# Altium PCB ZD-STM32-ZOUYU(remove layoout).PcbDoc (part 5 of 8)
Units mm, origin at the board's own origin, x right, y up, seen from the top; angles counter-clockwise.
Board outline 251.84 x 139.06 mm, 2 copper layers (Top Layer, Bottom Layer); 253 components, 246 nets, 1172 pads, 599 vias.
Unrouted connection lines stored in the file: 47.
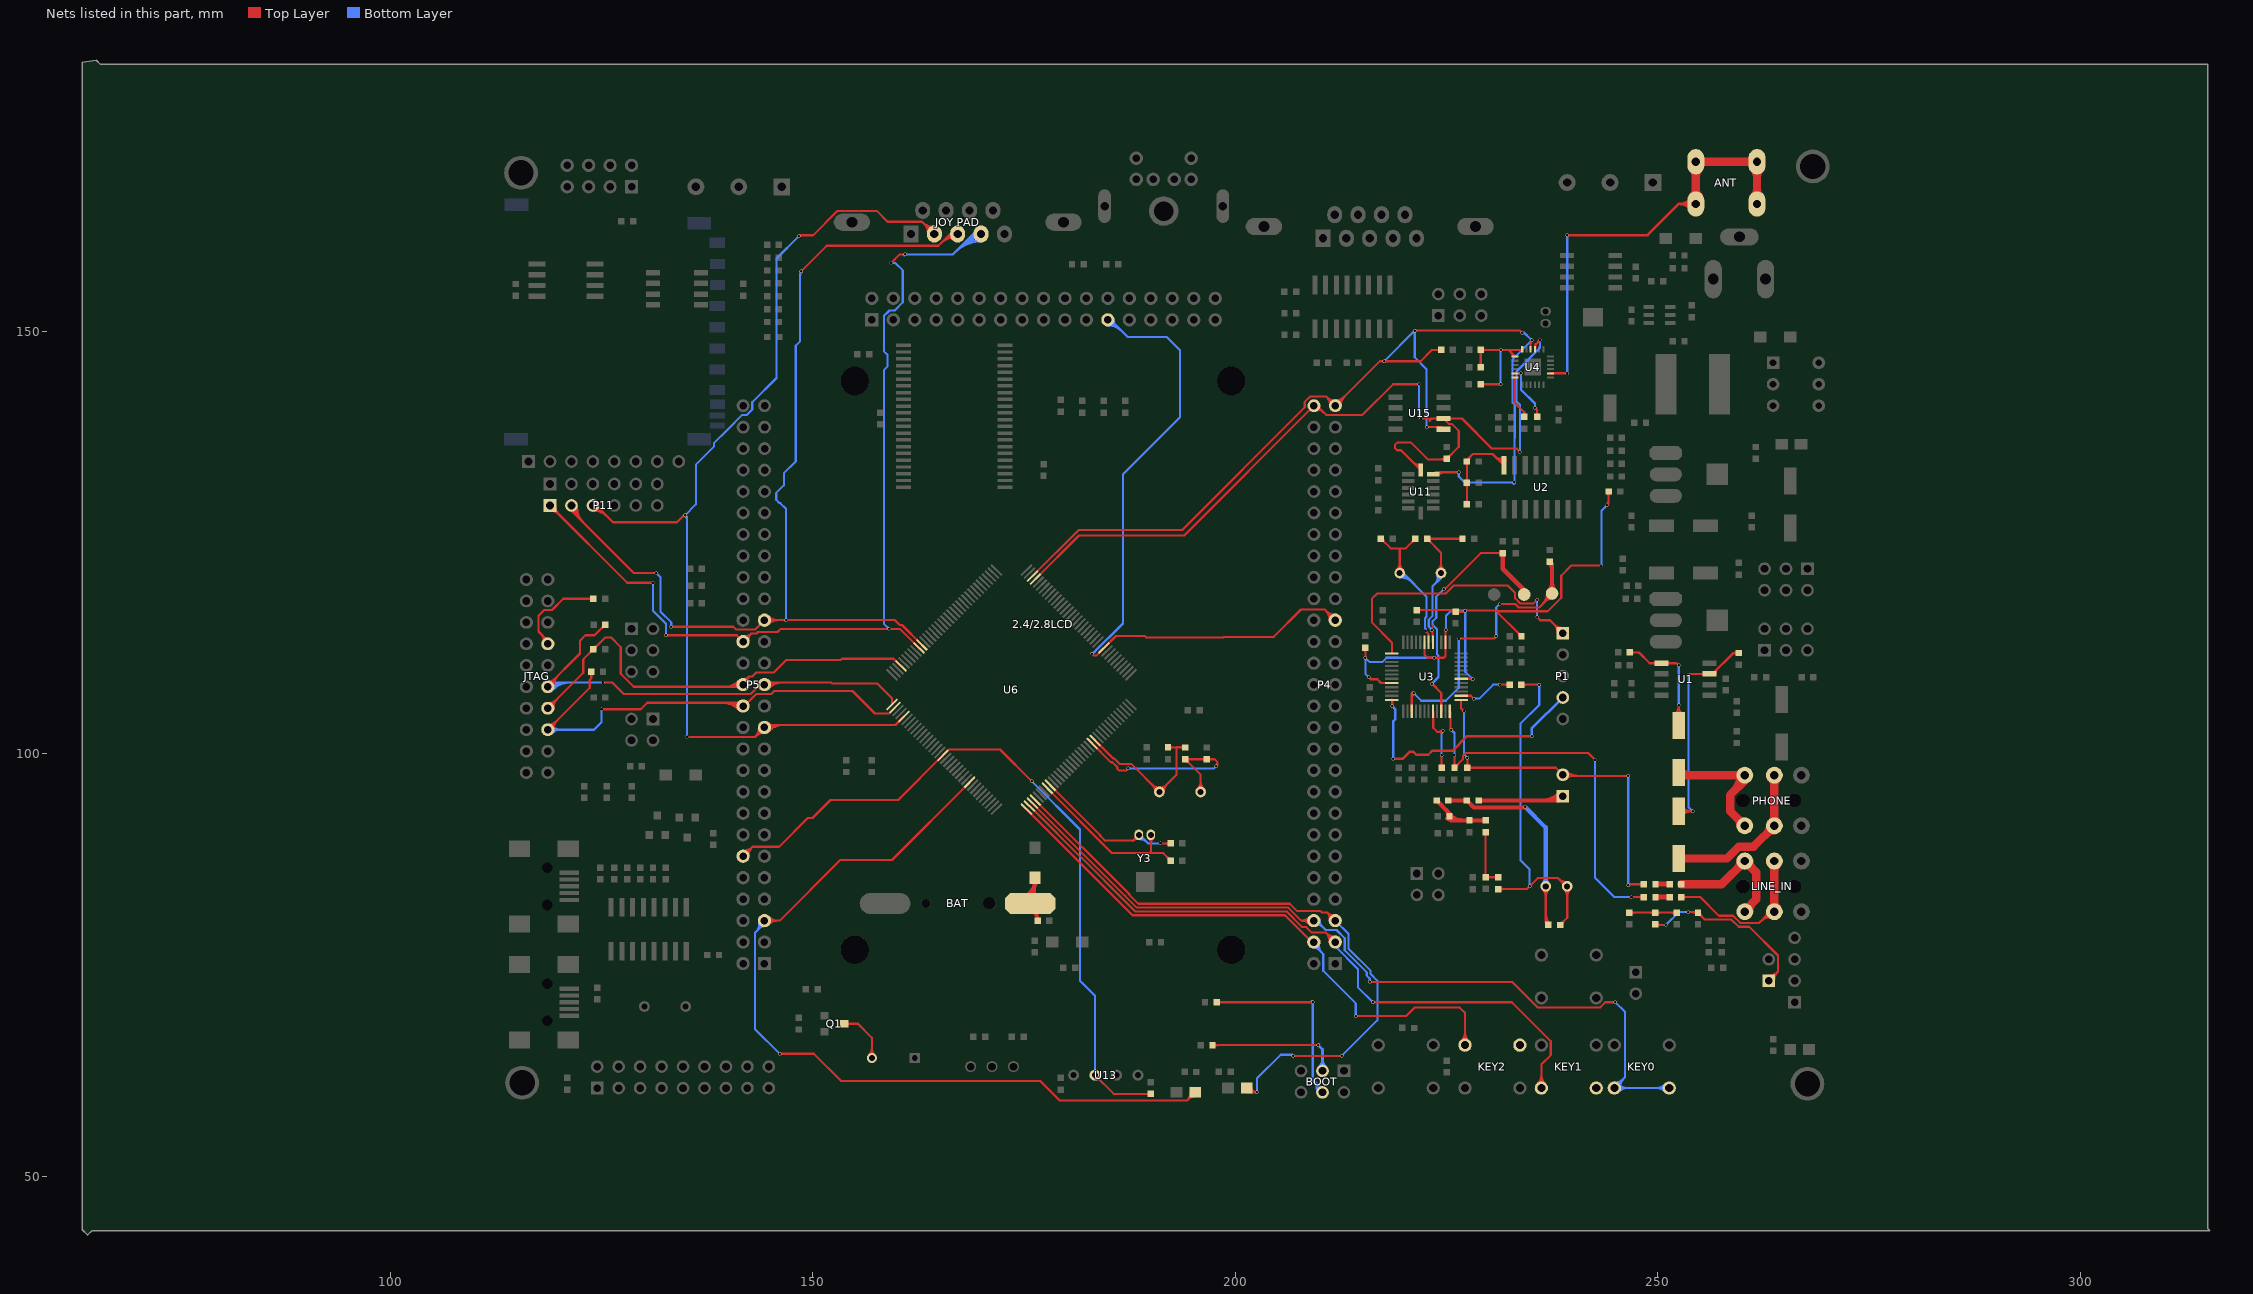
[diagram p5: the nets of this part, all layers, seen from the top]

## Via types
v1: diameter 0.4, hole 0.3, Top Layer to Bottom Layer, 598 vias
v2: diameter 0.3, hole 0.2, Top Layer to Bottom Layer, 1 vias

## Nets (pads, with @x,y where several pads share a name; then routed paths per layer and width w, separated by ;. In a path a pad name is that pad's centre, name@x,y a point inside that pad or via, vN(x,y) a via of type N, cw(c..) or ccw(c..) an arc to the next point about the centre after c; other vN are vias at no path point) (continued)
"IIC SCL": P4.54 R61.1 U4.9 U6.69 U11.14 U15.6 | length 115.8
  Top Layer w0.254: U6.69@176.327,120.689 181.495,125.857 193.929,125.857 P4.54@209.296,141.224 209.658,141.224 210.747,140.135 215.046,140.135 218.675,143.764 v1(221.742,143.764) ; P4.54@209.3,141.097 cw(c209.337,140.018) 210.101,140.781 ; P4.54@209.309,140.843 cw(c209.364,139.217) 210.514,140.368 ; P4.54@209.931,141.224 ccw(c210.59,141.224) 210.124,140.758 ; 220.882,134.668 ccw(c221.945,135.731) U11.14@221.945,134.227 ; 221.315,134.234 ccw(c221.945,134.864) U11.14@221.945,133.973 ; U11.14@221.749,133.8 ccw(c221.945,133.997) U11.14@221.945,133.719 ; v1@221.869,139.827 v1(221.996,139.7) 223.266,139.7 ; U11.14@221.945,133.604 219.605,135.944 219.141,135.944 218.875,136.21 218.875,136.586 219.141,136.852 220.802,136.852 222.78,134.874 224.968,134.874 R61.1@225.044,134.95 226.441,136.347 226.441,138.242 225.609,139.074 225.273,139.074 U15.6@224.648,139.7 ; 223.012,139.446 223.266,139.7 ; U15.6@224.005,139.565 ccw(c223.68,139.24) 223.68,139.7 ccw(c223.68,140.16) U15.6@224.005,139.835 ; 224.247,134.874 ccw(c224.247,135.747) R61.1@224.864,135.13 ; 224.615,134.874 cw(c224.615,134.521) R61.1@224.864,134.771 ; R61.1@225.044,135.204 ccw(c225.044,135.817) 225.478,135.384 ccw(c225.911,134.95) R61.1@225.298,134.95 ; U15.6@225.291,139.565 cw(c225.616,139.24) 225.616,139.7 cw(c225.616,140.16) U15.6@225.291,139.835 ; v1(233.68,135.763) 233.299,136.144 230.378,136.144 226.822,139.7 U15.6@224.648,139.7 ; U4.9@235.454,147.897 235.502,147.945 235.502,148.507 235.576,148.507 v1(236.067,148.997) ; 223.266,139.7 U15.6@224.648,139.7
  Bottom Layer w0.254: v1(221.742,143.764) 221.742,139.954 v1(221.996,139.7) ; 233.553,141.468 233.268,141.753 233.268,145.264 236.067,148.063 v1(236.067,148.997) ; v1(233.68,135.763) 233.68,141.341
"IIC SDA": P4.53 R62.1 U4.10 U6.70 U11.13 U15.5 | length 134.8
  Top Layer w0.254: U6.70@175.973,121.042 181.423,126.492 193.675,126.492 208.207,141.024 208.207,141.675 208.845,142.313 210.747,142.313 P4.53@211.836,141.224 217.099,146.487 v1(217.607,146.487) 221.925,146.487 223.266,147.828 R62.1@224.358,147.828 ; P4.53@211.201,141.224 ccw(c209.668,141.224) 210.752,142.308 ccw(c211.836,143.392) 211.836,141.859 ccw(c211.836,143.392) 212.92,142.308 ccw(c214.004,141.224) P4.53@212.471,141.224 ; P4.53@211.455,141.224 ccw(c210.535,141.224) 211.186,141.874 ccw(c211.836,142.525) 211.836,141.605 ccw(c211.836,142.525) 212.486,141.874 ccw(c213.137,141.224) P4.53@212.217,141.224 ; v1(221.234,150.114) 233.68,150.114 v1(233.934,149.86) ; v1(222.631,138.684) 224.394,138.684 U15.5@224.648,138.43 ; U11.13@223.426,133.096 223.68,133.35 v1(226.441,133.35) ; U11.13@223.833,133.189 cw(c224.223,132.799) 224.223,133.35 ; U11.13@224.013,133.009 cw(c224.836,132.186) 224.836,133.35 ; U4.10@234.954,147.897 234.954,148.848 v1(235.077,148.971) ; 234.954,148.498 cw(c235.55,148.498) v1@235.129,148.919
  Bottom Layer w0.254: P4.53@211.836,141.224 P4.53@212.344,141.224 ; v1(217.607,146.487) v1(221.234,150.114) 221.234,146.939 222.631,145.542 v1(222.631,138.684) ; v1(226.441,133.35) 226.441,132.842 227.146,132.137 v1(233.026,132.137) ; 232.918,131.953 233.064,132.099 v1(233.026,132.137) ; v1@233.934,149.787 cw(c233.934,148.998) 234.492,149.556 ; v1(233.934,149.86) 234.188,149.86 v1(235.077,148.971) 232.814,146.708 232.814,141.565 233.064,141.315 233.064,137.416 233.026,137.378 v1(233.026,132.137)
IOVDD: C11.2 C12.2 C13.2 R16.1 R17.2 U3.6 U3.14 U3.19 U3.32 | length 83.9
  Top Layer w0.254: R17.2@215.211,112.406 cw(c214.777,111.972) 215.39,111.972 cw(c216.004,111.972) R17.2@215.57,112.406 ; R17.2@215.39,112.585 215.39,111.381 v1(215.392,111.379) ; v1(215.773,109.093) 216.027,108.839 216.792,108.839 217.235,108.396 U3.32@218.527,108.396 ; C11.2@221.49,117.03 225.869,117.03 C12.2@226.06,116.84 ; C11.2@221.669,116.851 cw(c222.103,116.417) 222.103,117.03 cw(c222.103,117.644) C11.2@221.669,117.21 ; U3.19@222.377,113.246 222.377,111.76 222.758,111.379 v1(223.52,111.379) 224.663,111.379 224.877,111.593 U3.14@224.877,113.246 224.877,114.641 v1(224.917,114.681) ; 224.877,114.408 cw(c225.19,114.408) v1@224.969,114.629 ; 224.987,117.03 cw(c224.987,115.767) C12.2@225.88,116.66 ; 225.6,117.03 cw(c225.6,116.38) C12.2@226.06,116.84 ; C12.2@226.24,116.66 cw(c226.673,116.227) 226.673,116.84 cw(c226.673,117.453) C12.2@226.24,117.02 ; 226.72,116.84 ccw(c226.72,117.45) v1@227.151,117.019 ; U3.6@226.727,108.896 228.035,108.896 v1(228.092,108.839) ; 227.778,108.896 cw(c227.778,108.525) v1@228.04,108.787 ; C13.2@233.617,113.917 ccw(c233.003,113.917) 233.437,114.351 ccw(c233.87,114.785) C13.2@233.87,114.171 ; C13.2@233.87,113.917 230.821,116.967 ; v1(243.332,122.301) 239.776,122.301 238.567,121.092 238.567,118.491 236.963,116.887 230.901,116.887 230.821,116.967 ; v1@243.915,129.465 ccw(c243.3,130.08) 244.17,130.08 ; v1(243.967,129.413) 244.17,129.616 R16.1@244.17,131.064 ; R16.1@243.991,130.884 cw(c243.557,130.451) 244.17,130.451 cw(c244.783,130.451) R16.1@244.35,130.884 ; C12.2@226.06,116.84 227.076,116.84 v1(227.203,116.967) 230.821,116.967
  Bottom Layer w0.254: v1(215.773,109.093) 215.392,109.474 v1(215.392,111.379) 215.902,110.869 217.388,110.869 217.898,111.379 v1(223.52,111.379) ; v1(224.917,114.681) 224.917,116.332 225.552,116.967 v1(227.203,116.967) 227.203,109.728 v1(228.092,108.839) ; v1(243.332,122.301) 243.332,128.778 v1(243.967,129.413)
"IWIRE DQ": P5.12 R57.1 U6.126 U13.2 | length 90.4
  Top Layer w0.254: P5.12@141.721,87.895 142.836,89.009 ; P5.12@141.725,88.301 ccw(c141.732,89.255) 142.407,88.581 ccw(c143.081,87.906) P5.12@142.128,87.898 ; P5.12@141.727,88.555 ccw(c141.739,90.105) 142.836,89.009 ; P5.12@142.382,87.9 cw(c143.932,87.913) 142.836,89.009 ; v1(175.895,96.774) 172.14,100.529 166.066,100.529 U6.126@165.366,99.829 160.086,94.549 152.08,94.549 149.952,92.421 149.401,92.421 145.989,89.009 142.836,89.009 ; U13.2@183.388,61.976 185.598,59.766 R57.1@189.992,59.766
  Bottom Layer w0.254: v1(175.895,96.774) 181.61,91.059 181.61,73.152 183.388,71.374 U13.2@183.388,61.976
"JOY CLK": "JOY PAD.2" P5.23 P11.3 U6.113 | length 142.2
  Top Layer w0.254: P11.3@123.952,128.79 cw(c123.952,126.354) 125.674,128.077 ; P11.3@123.952,129.044 cw(c123.952,127.221) 125.241,128.51 ; P11.3@123.952,129.298 cw(c123.952,128.088) 124.807,128.944 ; P11.3@123.952,129.413 124.338,129.413 126.323,127.428 133.9,127.428 134.808,128.336 v1(134.874,128.27) ; P11.3@124.575,129.413 ccw(c125.147,129.413) 124.743,129.008 ; 134.524,128.052 cw(c134.874,127.702) v1@134.874,128.197 ; v1@135.001,102.108 v1(135.089,102.02) 143.147,102.02 ; P5.23@143.601,103.129 cw(c142.051,103.117) 143.147,102.02 ; P5.23@143.855,103.131 cw(c142.901,103.124) 143.575,102.449 cw(c144.25,101.775) P5.23@144.258,102.728 ; P5.23@144.256,102.474 ccw(c144.243,100.924) 143.147,102.02 ; P5.23@144.369,103.027 cw(c145.328,102.068) 145.328,103.424 ; P5.23@144.549,102.847 cw(c145.941,101.455) 145.941,103.424 ; P5.23@144.728,102.668 cw(c146.555,100.841) 146.555,103.424 ; P5.23@144.728,103.602 ccw(c145.156,104.03) 145.156,103.424 ; v1@148.388,161.238 cw(c148.773,160.853) 148.773,161.398 ; v1@148.499,161.398 150.025,161.398 152.911,164.284 157.537,164.284 158.826,162.995 162.912,162.995 164.363,161.544 ; U6.113@160.77,104.425 159.769,103.424 144.551,103.424 P5.23@144.261,103.135 143.147,102.02 ; 162.976,162.931 ccw(c164.193,164.149) 164.311,162.431 ; 163.152,162.755 cw(c162.068,161.671) 163.601,161.671 ; 163.371,162.537 ccw(c164.244,163.41) 164.329,162.178 ; 163.586,162.321 cw(c162.936,161.671) 163.855,161.671
  Bottom Layer w0.254: v1@134.822,128.218 cw(c134.18,127.576) 135.089,127.576 ; v1(135.089,102.02) 135.089,128.055 v1(134.874,128.27) 136.144,129.54 136.144,134.252 138.268,136.376 138.268,136.759 139.911,138.402 139.911,138.403 141.643,140.135 142.183,140.135 142.821,140.773 142.821,141.632 145.688,144.499 145.688,158.642 v1(148.336,161.29)
"JOY DAT": "JOY PAD.4" P5.32 P11.1 U6.99 | length 133.3
  Top Layer w0.254: P11.1@118.872,128.79 cw(c118.872,127.286) 119.936,128.349 cw(c120.999,129.413) P11.1@119.495,129.413 ; P11.1@118.872,129.044 cw(c118.872,128.153) 119.502,128.783 cw(c120.132,129.413) P11.1@119.241,129.413 ; P11.1@118.872,129.413 128.016,120.269 v1(131.064,120.269) ; v1(132.588,114.046) 140.97,114.046 P5.32@141.721,113.295 142.693,114.266 ; P5.32@141.766,113.699 ccw(c141.841,114.371) 142.319,113.893 ccw(c142.797,113.414) P5.32@142.125,113.34 ; P5.32@141.794,113.951 ccw(c141.916,115.044) 142.693,114.266 ; P5.32@142.378,113.368 cw(c143.47,113.489) 142.693,114.266 ; v1(159.258,158.115) 160.274,159.131 v1(160.909,159.131) ; U6.99@162.538,112.557 162.525,112.557 160.274,114.808 146.177,114.808 145.796,114.427 143.495,114.427 143.335,114.266 142.693,114.266
  Bottom Layer w0.254: v1(131.064,120.269) 131.064,116.962 132.588,115.438 v1(132.588,114.046) ; v1(159.004,114.808) 158.398,115.414 158.398,145.437 158.842,145.881 158.842,147.218 158.398,147.663 158.398,151.846 159.05,152.498 159.662,152.498 160.626,153.462 160.626,157.238 159.749,158.115 v1(159.258,158.115) ; v1@160.782,159.004 v1(160.909,159.131) 166.566,159.131 168.979,161.544 169.901,161.544 ; 166.809,159.374 cw(c169.901,156.283) 169.901,160.655 ; 167.243,159.808 cw(c169.901,157.15) 169.901,160.909 ; 167.676,160.242 cw(c169.901,158.017) 169.901,161.163 ; 168.11,160.675 cw(c169.901,158.885) 169.901,161.417 ; 168.544,161.109 cw(c169.901,159.752) 169.901,161.671 ; 168.977,161.543 cw(c169.901,160.619) 169.901,161.925
"JOY LAT": "JOY PAD.3" P5.33 P11.2 U6.98 | length 132.6
  Top Layer w0.254: P11.2@121.273,129.413 ccw(c122.43,129.413) 121.612,128.595 ; P11.2@121.412,129.413 121.412,128.795 128.795,121.412 v1(131.445,121.412) ; P11.2@121.527,129.413 ccw(c123.297,129.413) 122.046,128.161 ; P11.2@121.781,129.413 ccw(c124.165,129.413) 122.479,127.728 ; P11.2@122.035,129.413 ccw(c125.032,129.413) 122.913,127.294 ; v1(133.223,115.062) 140.576,115.062 140.918,114.72 143.147,114.72 P5.33@144.261,115.835 159.701,115.835 160.274,115.262 160.54,115.262 U6.98@162.892,112.911 ; P5.33@144.549,115.547 cw(c145.242,114.854) 145.242,115.835 cw(c145.242,116.816) P5.33@144.549,116.122 ; P5.33@144.728,115.368 cw(c145.856,114.24) 145.856,115.835 cw(c145.856,117.429) P5.33@144.728,116.302 ; 146.61,115.835 cw(c146.61,115.622) v1@146.76,115.772 ; v1@146.864,115.772 cw(c147.014,115.622) 147.014,115.835 ; 148.463,156.972 v1(148.616,157.125) 151.638,160.147 164.846,160.147 166.243,161.544 167.132,161.544 ; 165.123,160.424 cw(c166.926,158.62) 167.113,161.164 ; 165.515,160.816 cw(c166.98,159.351) 167.132,161.417 ; 165.907,161.208 cw(c167.034,160.081) 167.151,161.67
  Bottom Layer w0.254: v1(131.445,121.412) 131.953,120.904 131.953,116.84 133.223,115.57 v1(133.223,115.062) ; v1(146.812,115.824) 146.812,129.015 146.141,129.686 146.048,129.686 145.65,130.084 145.65,130.902 146.558,131.81 146.558,133.223 147.955,134.62 147.955,148.336 148.482,148.863 148.482,156.991 v1(148.616,157.125) ; 148.482,156.625 cw(c149.116,156.625) v1@148.668,157.073
JRDO: JTAG.13 R39.2 | length 14.8
  Top Layer w0.254: 117.725,114.271 cw(c116.549,113.095) JTAG.13@118.212,113.042 ; 118.14,113.856 cw(c117.353,113.069) JTAG.13@118.466,113.034 ; 118.176,113.821 ccw(c118.581,114.225) JTAG.13@118.581,113.653 ; JTAG.13@118.618,113.03 118.618,113.379 117.504,114.493 117.504,116.361 118.176,117.033 119.102,117.033 120.434,118.366 R39.2@124.015,118.366 ; R39.2@123.836,118.186 ccw(c123.402,117.752) 123.402,118.366 ccw(c123.402,118.979) R39.2@123.836,118.545
JTCK: JTAG.9 P5.27 R42.2 U6.109 | length 70.8
  Top Layer w0.254: JTAG.9@118.618,107.95 118.618,108.084 122.428,111.894 122.428,113.411 123.063,114.046 124.144,114.046 R42.2@125.412,115.314 ; JTAG.9@118.655,108.573 ccw(c118.655,109.663) 119.426,108.892 ; JTAG.9@119.024,107.95 cw(c120.329,107.95) 119.407,108.873 ; JTAG.9@119.278,107.95 cw(c121.196,107.95) 119.84,109.306 ; v1(125.095,108.458) 126.238,108.458 127.596,107.1 142.648,107.1 143.762,108.215 P5.27@144.261,108.215 ; R42.2@125.158,115.314 cw(c124.545,115.314) 124.979,114.881 cw(c125.412,114.447) R42.2@125.412,115.06 ; P5.27@144.33,108.215 144.573,108.458 152.146,108.458 152.273,108.331 157.607,108.331 159.356,106.582 U6.109@159.356,105.84 ; P5.27@144.369,108.107 cw(c145.215,107.261) 145.215,108.458 ; P5.27@144.549,107.927 cw(c145.829,106.647) 145.829,108.458 ; P5.27@144.728,107.748 cw(c146.442,106.034) 146.442,108.458 ; P5.27@144.728,108.682 ccw(c145.269,109.223) 145.269,108.458
  Bottom Layer w0.254: JTAG.9@118.557,108.048 cw(c119.546,107.059) 119.546,108.458 ; JTAG.9@118.618,107.95 119.126,108.458 v1(125.095,108.458) ; JTAG.9@118.737,107.869 cw(c120.159,106.446) 120.159,108.458 ; JTAG.9@118.916,107.689 cw(c120.773,105.833) 120.773,108.458 ; JTAG.9@119.096,107.509 cw(c121.386,105.22) 121.386,108.458
JTDI: JTAG.5 P5.26 R35.2 U6.110 | length 69.4
  Top Layer w0.254: JTAG.5@118.618,102.87 123.574,107.826 123.574,108.768 123.761,108.956 R35.2@123.761,109.73 ; JTAG.5@118.655,103.239 ccw(c118.655,104.04) 119.221,103.473 ; JTAG.5@118.655,103.493 ccw(c118.655,104.907) 119.655,103.907 ; JTAG.5@119.024,102.87 cw(c120.006,102.87) 119.312,103.564 ; JTAG.5@119.278,102.87 cw(c120.873,102.87) 119.745,103.997 ; R35.2@123.582,109.55 cw(c123.148,109.116) 123.761,109.116 cw(c124.375,109.116) R35.2@123.941,109.55 ; v1(124.968,105.283) 129.603,105.283 130.384,106.064 141.332,106.064 P5.26@141.721,105.675 141.864,105.675 143.29,107.1 145.064,107.1 145.406,107.442 154.686,107.442 157.342,104.786 159.015,104.786 159.71,105.481 U6.110@159.71,105.486 ; 139.187,106.064 cw(c139.187,103.141) P5.26@141.254,105.208 ; 139.8,106.064 cw(c139.8,103.754) P5.26@141.434,105.387 ; 140.414,106.064 cw(c140.414,104.367) P5.26@141.613,105.567 ; 141.027,106.064 cw(c141.027,104.98) P5.26@141.793,105.747
  Bottom Layer w0.254: JTAG.5@118.618,102.87 124.079,102.87 124.968,103.759 v1(124.968,105.283) ; JTAG.5@118.916,102.609 cw(c119.546,101.979) 119.546,102.87 cw(c119.546,103.761) JTAG.5@118.916,103.131 ; JTAG.5@119.096,102.429 cw(c120.159,101.366) 120.159,102.87 cw(c120.159,104.374) JTAG.5@119.096,103.311
JTMS: JTAG.7 P5.28 R36.2 U6.105 | length 65.2
  Top Layer w0.254: JTAG.7@118.618,105.41 122.809,109.601 122.809,111.19 R36.2@124.015,112.397 125.411,113.792 126.111,113.792 127.254,112.649 127.254,109.475 128.779,107.95 141.456,107.95 P5.28@141.721,108.215 141.721,108.448 142.46,109.186 ; JTAG.7@118.655,105.779 ccw(c118.655,106.58) 119.221,106.013 ; JTAG.7@118.655,106.033 ccw(c118.655,107.447) 119.655,106.447 ; JTAG.7@119.024,105.41 cw(c120.006,105.41) 119.312,106.104 ; JTAG.7@119.278,105.41 cw(c120.873,105.41) 119.745,106.537 ; R36.2@123.761,112.397 cw(c123.148,112.397) 123.582,111.963 cw(c124.015,111.529) R36.2@124.015,112.143 ; R36.2@124.015,112.651 ccw(c124.015,113.264) 124.449,112.83 ccw(c124.883,112.397) R36.2@124.269,112.397 ; 139.488,107.95 ccw(c139.488,110.448) P5.28@141.254,108.682 ; 140.101,107.95 ccw(c140.101,109.835) P5.28@141.434,108.502 ; 140.714,107.95 ccw(c140.714,109.222) P5.28@141.613,108.323 ; 140.766,107.95 cw(c140.766,107.26) P5.28@141.254,107.748 ; P5.28@141.721,108.875 ccw(c141.721,109.906) 142.45,109.177 ; P5.28@142.093,108.378 cw(c142.544,108.575) 142.196,108.923 ; P5.28@142.326,108.48 cw(c142.91,108.735) 142.459,109.186 ; U6.105@160.417,110.436 160.362,110.436 159.527,111.271 153.425,111.271 153.289,111.135 146.871,111.135 145.376,109.64 143.29,109.64 142.836,109.186 142.46,109.186
KEY0: KEY0.2 P4.6 U6.3 | length 116.8
  Top Layer w0.254: U6.3@175.973,94.172 186.979,83.166 186.979,83.154 188.326,81.807 206.254,81.807 207.786,80.275 ; P4.6@208.798,79.829 ccw(c207.786,78.904) 207.786,80.275 ; P4.6@208.798,80.721 cw(c207.786,81.646) 207.786,80.275 ; P4.6@208.985,80.001 ccw(c208.363,79.431) 208.363,80.275 ccw(c208.363,81.119) P4.6@208.985,80.549 ; P4.6@209.285,80.275 207.786,80.275 ; v1(215.9,73.025) 232.739,73.025 235.758,70.006 243.182,70.006 243.788,70.612 v1(244.983,70.612)
  Bottom Layer w0.254: P4.6@209.285,80.275 209.596,80.275 210.711,79.16 211.976,79.16 212.94,78.196 212.94,76.76 215.554,74.145 215.554,73.762 215.9,73.416 v1(215.9,73.025) ; P4.6@209.291,80.123 cw(c209.33,79.113) 210.044,79.827 ; P4.6@209.301,79.869 cw(c209.36,78.321) 210.455,79.416 ; P4.6@209.946,80.275 ccw(c210.789,80.275) 210.193,79.679 ; KEY0.2@244.856,60.858 ccw(c244.856,61.84) 245.55,61.146 ccw(c246.244,60.452) KEY0.2@245.262,60.452 ; KEY0.2@244.856,61.112 ccw(c244.856,62.707) 245.983,61.579 ccw(c247.111,60.452) KEY0.2@245.516,60.452 ; v1(244.983,70.612) 246.126,69.469 246.126,61.722 KEY0.2@244.856,60.452 KEY0.2@251.356,60.452 ; KEY0.2@245.143,60.165 cw(c245.837,59.471) 245.837,60.452 cw(c245.837,61.433) KEY0.2@245.143,60.739 ; KEY0.2@245.323,59.985 cw(c246.45,58.858) 246.45,60.452 cw(c246.45,62.046) KEY0.2@245.323,60.919 ; KEY0.2@250.889,59.985 ccw(c249.762,58.858) 249.762,60.452 ccw(c249.762,62.046) KEY0.2@250.889,60.919 ; KEY0.2@251.069,60.165 ccw(c250.375,59.471) 250.375,60.452 ccw(c250.375,61.433) KEY0.2@251.069,60.739
KEY1: KEY1.2 P4.3 U6.2 | length 88.8
  Top Layer w0.254: U6.2@175.62,93.819 175.685,93.819 178.821,90.683 178.932,90.572 184.531,84.972 184.531,84.96 188.138,81.353 206.066,81.353 207.917,79.502 208.389,79.502 209.042,78.849 210.711,78.849 ; P4.3@211.165,77.74 ccw(c209.615,77.753) 210.711,78.849 ; P4.3@211.419,77.738 ccw(c210.465,77.746) 211.139,78.421 ccw(c211.814,79.095) P4.3@211.822,78.141 ; P4.3@211.82,78.395 cw(c211.807,79.945) 210.711,78.849 ; P4.3@211.825,77.735 210.711,78.849 ; v1(216.281,70.612) 232.716,70.612 237.334,65.994 237.334,64.353 236.22,63.239 KEY1.2@236.22,60.452 ; KEY1.2@235.753,60.919 ccw(c234.626,62.046) 236.22,62.046 ccw(c237.814,62.046) KEY1.2@236.687,60.919 ; KEY1.2@235.933,60.739 ccw(c235.239,61.433) 236.22,61.433 ccw(c237.201,61.433) KEY1.2@236.507,60.739
  Bottom Layer w0.254: P4.3@211.825,77.735 211.825,77.232 214.503,74.554 214.503,72.39 v1(216.281,70.612)
KEY2: KEY2.2 P4.4 U6.1 | length 75.6
  Top Layer w0.254: U6.1@175.266,93.465 187.832,80.899 205.878,80.899 209.042,77.735 P4.4@209.285,77.735 ; v1(214.249,68.961) 220.199,68.961 221.207,69.969 226.574,69.969 227.18,69.363 KEY2.2@227.18,65.532 ; KEY2.2@226.713,65.999 ccw(c225.586,67.126) 227.18,67.126 ccw(c228.774,67.126) KEY2.2@227.647,65.999 ; KEY2.2@226.893,65.819 ccw(c226.199,66.513) 227.18,66.513 ccw(c228.161,66.513) KEY2.2@227.467,65.819
  Bottom Layer w0.254: P4.4@209.285,77.074 cw(c209.285,76.231) 209.881,76.827 ; P4.4@209.285,77.735 209.285,77.424 210.4,76.309 210.4,74.327 214.249,70.478 v1(214.249,68.961) ; P4.4@209.681,77.641 ccw(c210.566,77.43) 209.922,76.786 ; P4.4@209.928,77.582 ccw(c211.086,77.306) 210.244,76.465
"LCD BL": 2.4/2.8LCD.23 P4.33 U6.46 | length 91.2
  Top Layer w0.254: v1(183.007,111.887) 183.261,111.633 183.534,111.633 U6.46@184.458,112.557 185.861,113.96 189.285,113.96 189.44,113.805 198.599,113.805 198.653,113.859 204.537,113.859 207.772,117.094 210.566,117.094 P4.33@211.825,115.835 ; P4.33@211.165,115.835 ccw(c209.57,115.835) 210.698,116.962 ccw(c211.825,118.09) P4.33@211.825,116.495 ; P4.33@211.419,115.835 ccw(c210.438,115.835) 211.131,116.529 ccw(c211.825,117.222) P4.33@211.825,116.241
  Bottom Layer w0.254: v1@183.007,111.96 ccw(c183.007,112.443) 183.348,112.101 ; v1@183.134,111.887 186.69,115.443 186.69,133.096 193.44,139.846 193.44,147.79 191.878,149.352 187.255,149.352 185.223,151.384 2.4/2.8LCD.23@184.912,151.384 ; 2.4/2.8LCD.23@184.912,150.724 cw(c184.912,148.378) 186.571,150.037 ; 2.4/2.8LCD.23@184.912,150.978 cw(c184.912,149.245) 186.137,150.47 ; 2.4/2.8LCD.23@184.912,151.232 cw(c184.912,150.112) 185.703,150.904 ; 2.4/2.8LCD.23@185.572,151.384 ccw(c186.415,151.384) 185.819,150.788
LED0: DS0.2 P5.5 U6.135 | length 109.6
  Top Layer w0.254: P5.5@144.261,80.275 146.054,80.275 153.228,87.449 159.35,87.449 U6.135@168.548,96.647 ; P5.5@144.549,79.987 cw(c145.242,79.294) 145.242,80.275 cw(c145.242,81.256) P5.5@144.549,80.562 ; P5.5@144.728,79.808 cw(c145.856,78.68) 145.856,80.275 cw(c145.856,81.869) P5.5@144.728,80.742 ; v1(146.05,64.516) 150.097,64.516 153.332,61.281 176.901,61.281 179.202,58.98 194.289,58.98 DS0.2@195.251,59.942 ; 194.321,59.013 ccw(c193.458,59.877) DS0.2@194.678,59.923 ; 194.43,59.121 cw(c195.186,58.365) DS0.2@195.186,59.434 ; DS0.2@194.733,59.424 ccw(c194.25,59.907) DS0.2@194.932,59.933
  Bottom Layer w0.254: 143.302,79.005 ccw(c142.461,79.846) P5.5@143.619,80.122 ; 143.624,79.326 ccw(c142.98,79.97) P5.5@143.866,80.181 ; 143.665,79.367 cw(c144.261,78.771) P5.5@144.261,79.614 ; P5.5@144.261,80.275 144.261,79.964 143.147,78.849 143.147,72.228 143.148,72.227 143.148,71.791 143.147,71.79 143.147,67.419 v1(146.05,64.516)
LED1: DS1.2 P4.5 U6.4 | length 81.7
  Top Layer w0.254: U6.4@176.327,94.526 187.433,83.419 187.433,83.343 188.515,82.261 206.442,82.261 207.314,81.389 210.069,81.389 210.212,81.246 210.854,81.246 ; DS1.2@201.347,59.942 v1(202.547,59.942) cw(c202.547,60.576) DS1.2@201.917,60.506 ; DS1.2@201.412,60.45 ccw(c201.979,60.513) DS1.2@201.979,59.942 ; DS1.2@201.664,60.478 ccw(c202.263,60.545) 202.263,59.942 ; v1(206.866,64.262) v1(212.598,64.262) ; P4.5@211.169,80.348 ccw(c210.076,80.469) 210.854,81.246 ; P4.5@211.421,80.32 ccw(c210.749,80.394) 211.227,80.873 ccw(c211.706,81.351) P4.5@211.78,80.679 ; P4.5@211.752,80.931 cw(c211.631,82.024) 210.854,81.246 ; P4.5@211.825,80.275 210.854,81.246
  Bottom Layer w0.254: v1(202.547,59.942) 202.547,61.577 205.359,64.389 206.739,64.389 v1(206.866,64.262) ; 206.383,64.389 cw(c206.383,63.779) v1@206.815,64.21 ; P4.5@211.825,80.275 213.394,78.706 213.394,76.948 216.008,74.333 216.008,73.95 216.808,73.15 216.808,68.472 v1(212.598,64.262)
LRCK: P1.4 U3.36 | length 31.1
  Top Layer w0.3: U3.36@218.527,106.396 218.567,106.356 v1(218.567,105.664) ; v1(218.694,99.441) 219.821,99.441 220.625,100.245 221.081,100.245 221.419,99.907 222.827,99.907 223.292,100.372 225.705,100.372 227.441,102.108 v1(235.077,102.108)
  Bottom Layer w0.3: v1(218.567,105.664) 218.914,105.317 218.914,104.09 218.694,103.87 v1(218.694,99.441) ; v1(235.077,102.108) 235.077,102.997 P1.4@238.76,106.68
MCLK: P1.1 U3.25 | length 38.7
  Top Layer w0.254: U3.25@218.527,111.896 218.527,113.197 216.154,115.57 216.154,118.364 216.77,118.98 224.881,118.98 225.85,119.949 232.222,119.949 233.111,119.06 233.111,118.426 233.742,117.795 235.27,117.795 v1(235.712,118.237) ; v1(235.712,116.205) 236.093,115.824 237.236,115.824 P1.1@238.76,114.3 ; P1.1@238.137,114.3 ccw(c236.633,114.3) 237.696,115.364 ccw(c238.76,116.427) P1.1@238.76,114.923 ; P1.1@238.391,114.3 ccw(c237.5,114.3) 238.13,114.93 ccw(c238.76,115.56) P1.1@238.76,114.669
  Bottom Layer w0.254: v1(235.712,116.205) v1(235.712,118.237) v1@235.712,118.242
"MP3 LEFT": R8.1 TP1.1 U3.46 | length 32.1
  Top Layer w0.254: v1(223.266,108.331) 224.377,107.22 U3.46@224.377,105.046 ; v1(224.663,119.507) 224.766,119.507 229.033,123.774 R8.1@231.648,123.774 ; v1@224.663,119.58 ccw(c224.663,120.005) 224.964,119.705 ; R8.1@231.468,123.595 ccw(c231.035,123.161) 231.035,123.774 ccw(c231.035,124.387) R8.1@231.468,123.954
  Top Layer w0.5: R8.1@231.648,123.774 231.648,121.92 234.188,119.38 TP1.1@234.188,118.872
  Bottom Layer w0.254: v1(223.266,108.331) 224.047,109.112 224.047,111.597 223.877,111.767 223.877,114.736 223.35,115.263 223.35,115.699 223.774,116.123 223.774,118.618 v1(224.663,119.507)
"MP3 RIGHT": R10.1 TP2.1 U3.39 | length 41.1
  Top Layer w0.254: U3.39@220.877,105.046 220.877,106.958 v1(221.107,107.188) ; 220.877,106.456 cw(c221.839,106.456) v1@221.159,107.136 ; 220.877,107.07 cw(c221.225,107.07) v1@220.979,107.316 ; v1(226.441,113.665) 230.632,113.665 v1(230.886,113.919) ; v1(231.267,117.729) 233.166,117.729 233.554,117.341 235.959,117.341 237.49,118.872 TP2.1@237.49,118.999 ; 236.337,117.719 ccw(c235.056,118.999) TP2.1@236.867,118.999 ; 236.643,118.025 cw(c237.49,117.179) TP2.1@237.49,118.376 ; 236.77,118.152 ccw(c235.924,118.999) TP2.1@237.121,118.999
  Top Layer w0.5: TP2.1@237.136,119.353 ccw(c236.283,120.206) 237.49,120.206 ccw(c238.697,120.206) TP2.1@237.844,119.353 ; R10.1@237.143,122.666 cw(c236.307,121.829) 237.49,121.829 ; R10.1@237.236,122.758 237.49,122.504 TP2.1@237.49,118.999
  Bottom Layer w0.254: v1(221.107,107.188) 221.996,106.299 224.917,106.299 226.441,107.823 v1(226.441,113.665) ; v1(230.886,113.919) 230.886,117.348 v1(231.267,117.729)
NetANT_1: ANT.1 ANT.2 ANT.3 ANT.4 U4.2 | length 120.5
  Top Layer w0.3: U4.2@237.305,145.046 239.256,145.046 v1(239.268,145.034) ; v1(239.268,161.417) 248.793,161.417 252.476,165.1 ; ANT.1@253.903,164.503 ccw(c252.476,163.096) 252.476,165.1 ; ANT.1@253.903,165.697 cw(c252.476,167.104) 252.476,165.1 ; ANT.1@254.116,164.714 ccw(c253.193,163.804) 253.193,165.1 ccw(c253.193,166.396) ANT.1@254.116,165.486 ; ANT.1@254.508,165.1 252.476,165.1
  Top Layer w1: ANT.1@254.154,165.954 ccw(c253.301,166.807) 254.508,166.807 ccw(c255.715,166.807) ANT.1@254.862,165.954 ; ANT.4@254.154,169.246 cw(c253.301,168.393) 254.508,168.393 cw(c255.715,168.393) ANT.4@254.862,169.246 ; ANT.1@254.508,165.1 ANT.4@254.508,170.1 ANT.3@261.747,170.1 ANT.2@261.747,165.1 ; ANT.4@254.862,169.746 cw(c255.715,168.893) 255.715,170.1 cw(c255.715,171.307) ANT.4@254.862,170.454 ; ANT.2@261.393,165.954 ccw(c260.54,166.807) 261.747,166.807 ccw(c262.954,166.807) ANT.2@262.101,165.954 ; ANT.3@261.393,169.246 cw(c260.54,168.393) 261.747,168.393 cw(c262.954,168.393) ANT.3@262.101,169.246 ; ANT.3@261.393,169.746 ccw(c260.54,168.893) 260.54,170.1 ccw(c260.54,171.307) ANT.3@261.393,170.454
  Bottom Layer w0.254: ANT.1@253.891,166.217 ccw(c252.4,167.708) 254.508,167.708 ccw(c256.616,167.708) ANT.1@255.125,166.217 ; ANT.4@253.891,168.983 cw(c252.4,167.492) 254.508,167.492 cw(c256.616,167.492) ANT.4@255.125,168.983 ; ANT.1@254.07,166.038 ccw(c253.014,167.094) 254.508,167.094 ccw(c256.002,167.094) ANT.1@254.946,166.038 ; ANT.4@254.07,169.162 cw(c253.014,168.106) 254.508,168.106 cw(c256.002,168.106) ANT.4@254.946,169.162 ; ANT.1@254.508,165.1 ANT.4@254.508,170.1 ANT.3@261.747,170.1 ANT.2@261.747,165.1 ; ANT.4@254.946,169.662 cw(c256.002,168.606) 256.002,170.1 cw(c256.002,171.594) ANT.4@254.946,170.538 ; ANT.4@255.125,169.483 cw(c256.616,167.992) 256.616,170.1 cw(c256.616,172.208) ANT.4@255.125,170.717 ; ANT.2@261.13,166.217 ccw(c259.639,167.708) 261.747,167.708 ccw(c263.855,167.708) ANT.2@262.364,166.217 ; ANT.3@261.13,168.983 cw(c259.639,167.492) 261.747,167.492 cw(c263.855,167.492) ANT.3@262.364,168.983 ; ANT.3@261.13,169.483 ccw(c259.639,167.992) 259.639,170.1 ccw(c259.639,172.208) ANT.3@261.13,170.717 ; ANT.2@261.309,166.038 ccw(c260.253,167.094) 261.747,167.094 ccw(c263.241,167.094) ANT.2@262.185,166.038 ; ANT.3@261.309,169.162 cw(c260.253,168.106) 261.747,168.106 cw(c263.241,168.106) ANT.3@262.185,169.162 ; ANT.3@261.309,169.662 ccw(c260.253,168.606) 260.253,170.1 ccw(c260.253,171.594) ANT.3@261.309,170.538
  Bottom Layer w0.3: v1(239.268,145.034) v1(239.268,161.417) ; ANT.1@254.254,164.846 ANT.1@254.508,165.1
NetBAT_1: BAT.1 C46.2 D2.1 | length 25.6
  Top Layer w0.254: BAT.1@175.127,83.241 ccw(c173.777,85.344) D2.1@176.276,85.344 176.276,82.838 BAT.1@175.734,82.296 176.594,81.436 C46.2@176.594,80.01 ; BAT.1@175.264,83.027 ccw(c174.076,84.879) D2.1@176.276,84.879 ; BAT.1@175.401,82.814 ccw(c174.374,84.414) 176.276,84.414 ; BAT.1@175.539,82.6 ccw(c174.672,83.949) 176.276,83.949 ; BAT.1@175.555,81.446 cw(c175.287,80.167) C46.2@176.594,80.167 ; BAT.1@175.607,81.694 cw(c175.352,80.479) C46.2@176.594,80.479 ; BAT.1@175.659,81.943 cw(c175.418,80.792) 176.594,80.792 ; BAT.1@175.676,82.386 ccw(c174.971,83.484) BAT.1@176.276,83.484 ; BAT.1@175.712,82.191 cw(c175.484,81.105) BAT.1@176.594,81.105 ; D2.1@175.906,84.874 cw(c175.013,83.981) 176.276,83.981 cw(c177.539,83.981) D2.1@176.646,84.874 ; 176.276,83.698 ccw(c177.135,83.698) BAT.1@176.528,83.09 ; C46.2@176.414,80.445 ccw(c175.98,80.879) 176.594,80.879 ccw(c177.207,80.879) C46.2@176.773,80.445
NetBEEP_2: BEEP.2 Q1.3 | length 9.4
  Top Layer w0.254: Q1.3@153.702,68.072 155.321,68.072 156.972,66.421 BEEP.2@156.972,64.008 ; Q1.3@153.955,67.844 cw(c154.507,67.292) 154.507,68.072 cw(c154.507,68.852) Q1.3@153.955,68.3 ; BEEP.2@156.638,64.342 ccw(c155.83,65.15) 156.972,65.15 ccw(c158.114,65.15) BEEP.2@157.306,64.342
NetBOOT_3: BOOT.3 R40.2 | length 19.2
  Top Layer w0.254: R40.2@197.294,65.53 v1(209.802,65.53) v1@209.931,65.659 ; R40.2@197.474,65.351 cw(c197.908,64.917) 197.908,65.53 cw(c197.908,66.144) R40.2@197.474,65.71
  Bottom Layer w0.3: v1(209.802,65.53) 210.312,65.021 BOOT.3@210.312,62.484 ; BOOT.3@209.888,62.908 ccw(c208.863,63.933) 210.312,63.933 ccw(c211.761,63.933) BOOT.3@210.736,62.908
NetBOOT_4: BOOT.4 R41.1 | length 27.2
  Top Layer w0.254: R41.1@197.79,70.612 v1(209.169,70.612) ; R41.1@197.969,70.432 cw(c198.403,69.999) 198.403,70.612 cw(c198.403,71.225) R41.1@197.969,70.792
  Bottom Layer w0.3: v1@209.042,70.739 v1(209.169,70.612) 209.169,61.427 210.312,60.284 BOOT.4@210.312,59.944 ; 209.047,61.549 cw(c207.443,59.944) BOOT.4@209.712,59.944 ; 209.559,61.037 cw(c208.467,59.944) BOOT.4@210.012,59.944 ; 209.868,60.728 ccw(c210.312,61.172) BOOT.4@210.312,60.544
NetC1_1: C1.1 R1.2 U1.1 | length 19.7
  Top Layer w0.254: R1.2@246.697,112.012 247.779,112.012 249.047,110.744 U1.1@250.444,110.744 252.222,110.744 v1(252.476,110.49) ; R1.2@246.877,111.833 cw(c247.311,111.399) 247.311,112.012 cw(c247.311,112.626) R1.2@246.877,112.192 ; U1.1@249.801,110.609 ccw(c249.476,110.284) 249.476,110.744 ccw(c249.476,111.204) U1.1@249.801,110.879 ; U1.1@251.087,110.609 cw(c251.412,110.284) 251.412,110.744 cw(c251.412,111.204) U1.1@251.087,110.879 ; C1.1@252.035,104.669 ccw(c250.972,105.732) 252.476,105.732 ccw(c253.98,105.732) C1.1@252.917,104.669 ; C1.1@252.215,104.489 ccw(c251.585,105.119) 252.476,105.119 ccw(c253.367,105.119) C1.1@252.737,104.489 ; C1.1@252.476,103.378 v1(252.476,105.791)
  Bottom Layer w0.254: v1(252.476,105.791) v1(252.476,110.49)
NetC1_2: C1.2 PHONE.1 | length 22.6
  Top Layer w1: C1.2@252.476,97.784 252.772,97.488 PHONE.1@260.302,97.488 260.302,96.869 258.558,95.125 258.558,93.232 PHONE.1@260.302,91.488 ; C1.2@252.653,97.961 ccw(c253.794,99.102) 253.794,97.488 ; 259.011,95.578 ccw(c257.101,97.488) PHONE.1@259.802,97.488 ; PHONE.1@259.802,91.488 ccw(c258.595,91.488) 259.448,92.342 ccw(c260.302,93.195) PHONE.1@260.302,91.988 ; PHONE.1@259.948,97.134 ccw(c259.095,96.281) 259.095,97.488 ccw(c259.095,98.695) PHONE.1@259.948,97.842
NetC3_1: C3.1 C6.1 R3.1 U2.16 | length 17.9
  Top Layer w0.254: C3.1@227.227,129.72 ccw(c226.793,130.153) 227.406,130.153 ccw(c228.019,130.153) C3.1@227.586,129.72 ; R3.1@227.227,131.9 cw(c226.793,131.467) 227.406,131.467 cw(c228.019,131.467) R3.1@227.586,131.9 ; R3.1@227.227,132.26 ccw(c226.793,132.693) 227.406,132.693 ccw(c228.019,132.693) R3.1@227.586,132.26 ; C6.1@227.227,134.44 cw(c226.793,134.007) 227.406,134.007 cw(c228.019,134.007) C6.1@227.586,134.44 ; C3.1@227.406,129.54 R3.1@227.406,132.08 C6.1@227.406,134.62 227.457,134.671 227.457,134.874 228.092,135.509 230.438,135.509 U2.16@231.775,134.172 ; C6.1@227.66,134.62 cw(c228.764,134.62) 227.983,135.4 ; 230.838,135.109 ccw(c231.253,135.524) U2.16@231.656,135.098 ; 231.023,134.924 ccw(c231.432,135.334) U2.16@231.831,134.913 ; 231.207,134.74 ccw(c231.612,135.144) U2.16@232.005,134.729
NetC5_1: C5.1 R4.2 U1.7 | length 31.7
  Top Layer w0.254: C5.1@252.476,93.218 v1(254.127,93.218) ; C5.1@252.737,92.957 cw(c253.367,92.327) 253.367,93.218 cw(c253.367,94.109) C5.1@252.737,93.479 ; C5.1@252.917,92.777 cw(c253.98,91.714) 253.98,93.218 cw(c253.98,94.722) C5.1@252.917,93.659 ; v1(253.619,109.347) 253.746,109.474 U1.7@256.144,109.474 256.479,109.474 258.956,111.95 R4.2@259.59,111.95 ; v1@253.671,109.295 cw(c254.102,108.864) 254.102,109.474 ; U1.7@255.501,109.339 ccw(c255.176,109.014) 255.176,109.474 ccw(c255.176,109.934) U1.7@255.501,109.609 ; U1.7@256.842,109.474 cw(c257.719,109.474) 257.099,110.094 ; R4.2@259.41,111.771 ccw(c258.976,111.337) 258.976,111.95 ccw(c258.976,112.564) R4.2@259.41,112.13
  Bottom Layer w0.254: v1(253.619,109.347) 253.619,93.726 v1(254.127,93.218)
NetC5_2: C5.2 PHONE.2 | length 24.6
  Top Layer w1: C5.2@252.476,87.624 258.194,87.624 259.598,89.028 261.342,89.028 PHONE.2@263.802,91.488 PHONE.2@263.802,97.488 ; PHONE.2@263.302,91.488 cw(c262.095,91.488) 262.948,90.634 cw(c263.802,89.781) PHONE.2@263.802,90.988 ; PHONE.2@263.448,91.842 ccw(c262.595,92.695) 263.802,92.695 ccw(c265.009,92.695) PHONE.2@264.156,91.842 ; PHONE.2@263.448,97.134 cw(c262.595,96.281) 263.802,96.281 cw(c265.009,96.281) PHONE.2@264.156,97.134
NetC18_2: C18.2 C19.2 R18.1 U4.12 U4.13 | length 19.1
  Top Layer w0.254: C19.2@228.865,145.974 ccw(c228.431,146.408) 229.044,146.408 ccw(c229.658,146.408) C19.2@229.224,145.974 ; C18.2@228.865,147.647 cw(c228.431,147.213) 229.044,147.213 cw(c229.658,147.213) 229.224,147.647 cw(c229.658,147.213) 229.658,147.826 cw(c229.658,148.44) C18.2@229.224,148.006 ; R18.1@229.032,143.764 v1(231.394,143.764) ; C19.2@229.044,145.794 C18.2@229.044,147.826 v1(231.394,147.826) 232.322,147.826 ; R18.1@229.211,143.584 cw(c229.645,143.151) 229.645,143.764 cw(c229.645,144.377) R18.1@229.211,143.944 ; 232.637,147.512 cw(c232.171,147.046) U4.13@232.83,147.046 ; U4.13@233.07,147.078 cw(c233.038,147.046) U4.13@233.084,147.046 ; U4.13@233.103,147.046 232.322,147.826 ; 233.788,147.826 ccw(c233.788,148.063) U4.12@233.954,147.897 ; U4.12@233.954,147.897 233.883,147.826 232.322,147.826
  Bottom Layer w0.254: v1(231.394,143.764) v1(231.394,147.826)
NetC20_2: C20.2 R19.1 U3.18 Y1.1 | length 25.7
  Top Layer w0.254: C20.2@217.233,125.224 cw(c217.233,124.61) 217.667,125.044 cw(c218.101,125.478) C20.2@217.487,125.478 ; C20.2@217.233,125.478 218.378,124.333 219.456,124.333 ; Y1.1@219.097,121.771 ccw(c218.23,122.638) 219.456,122.638 ccw(c220.682,122.638) Y1.1@219.815,121.771 ; Y1.1@219.456,121.412 219.456,124.333 ; R19.1@221.056,125.476 cw(c220.443,125.476) 220.877,125.042 cw(c221.31,124.609) R19.1@221.31,125.222 ; R19.1@221.31,125.476 220.167,124.333 219.456,124.333 ; v1(222.504,114.554) 222.877,114.181 U3.18@222.877,113.246
  Bottom Layer w0.254: Y1.1@219.456,120.904 cw(c219.456,118.758) 220.974,120.275 ; Y1.1@219.456,121.158 cw(c219.456,119.625) 220.54,120.709 ; Y1.1@219.964,121.412 ccw(c220.271,121.412) 220.054,121.195 ; 220.106,121.143 ccw(c219.456,120.492) Y1.1@219.456,121.412 219.837,121.412 222.631,118.618 222.631,116.264 222.442,116.075 222.442,114.887 222.579,114.75 222.579,114.629 v1(222.504,114.554)
NetC21_2: C21.2 R19.2 U3.17 Y1.2 | length 26.7
  Top Layer w0.254: R19.2@222.695,125.22 cw(c222.695,124.607) 223.128,125.041 cw(c223.562,125.474) R19.2@222.948,125.474 ; R19.2@222.874,125.295 cw(c223.308,124.861) 223.308,125.474 cw(c223.308,126.088) R19.2@222.874,125.654 ; v1@223.179,114.585 cw(c222.768,114.173) 223.35,114.173 ; v1(223.231,114.636) 223.35,114.517 223.35,113.273 U3.17@223.377,113.246 ; 223.35,115.026 223.393,115.069 223.393,115.189 ; Y1.2@223.977,121.771 ccw(c223.11,122.638) 224.336,122.638 ccw(c225.562,122.638) Y1.2@224.695,121.771 ; Y1.2@224.336,121.412 224.336,123.833 R19.2@222.695,125.474 226.882,125.474 C21.2@226.885,125.478 ; 226.264,125.474 ccw(c226.264,126.099) C21.2@226.706,125.657 ; 226.28,125.474 cw(c226.28,124.872) C21.2@226.706,125.298
  Bottom Layer w0.254: 223.033,114.937 cw(c222.733,114.636) v1@223.158,114.636 ; v1(223.231,114.636) 223.231,114.74 222.896,115.075 222.896,115.887 223.32,116.311 223.32,119.815 224.336,120.831 Y1.2@224.336,121.412 cw(c223.672,121.168) 224.172,120.667 ; 223.611,120.106 ccw(c222.851,120.866) Y1.2@223.859,121.237 ; 223.891,120.386 ccw(c223.261,121.017) Y1.2@224.098,121.324
NetC22_2: C22.2 U4.18 | length 6
  Top Layer w0.254: U4.18@233.103,144.546 233.103,141.547 234.19,140.46 ; C22.2@234.02,140.079 ccw(c233.677,140.46) 234.19,140.46 ; C22.2@234.19,139.891 234.19,140.46 ; C22.2@234.359,140.079 cw(c234.702,140.46) 234.19,140.46
NetC23_2: C23.2 U4.17 | length 7.6
  Top Layer w0.254: U4.17@233.103,145.046 v1(233.795,145.046) v1@233.807,145.034 ; v1(235.458,140.97) 235.714,140.714 C23.2@235.714,139.891 ; C23.2@235.534,140.07 ccw(c235.1,140.504) 235.714,140.504 ccw(c236.327,140.504) C23.2@235.893,140.07
  Bottom Layer w0.254: v1(233.795,145.046) 233.795,143.141 235.458,141.478 v1(235.458,140.97)
NetC24_2: C24.2 C25.2 R21.1 R22.2 | length 10
  Top Layer w0.5: R22.2@223.837,94.49 223.837,94.474 225.349,92.963 R21.1@225.349,92.634 225.844,92.138 C24.2@227.713,92.138 C25.2@229.618,92.138 ; 224.893,93.419 cw(c224.108,92.634) R21.1@225.218,92.634 ; R21.1@225.088,92.373 ccw(c225.654,92.939) 225.654,92.138 ; R21.1@225.441,92.726 ccw(c226.861,94.146) 226.861,92.138
NetC25_1: C25.1 R23.1 R24.2 | length 8.8
  Top Layer w0.254: C25.1@229.616,90.754 229.616,85.409 R24.2@229.618,85.407 231.127,85.407 R23.1@231.14,85.395 ; R24.2@229.797,85.228 cw(c230.231,84.794) 230.231,85.407 cw(c230.231,86.021) R24.2@229.797,85.587 ; 230.496,85.407 cw(c230.496,84.751) R23.1@230.96,85.215 ; 230.557,85.407 ccw(c230.557,85.977) R23.1@230.96,85.574
NetC29_1: C29.1 U3.44 | length 9.7
  Top Layer w0.254: U3.44@223.377,105.046 223.423,105 223.423,103.087 223.894,102.616 v1@224.536,102.616 ; 224.053,102.616 ccw(c224.053,103.226) v1@224.484,102.795 ; C29.1@224.229,98.528 ccw(c223.796,98.962) 224.409,98.962 ccw(c225.022,98.962) C29.1@224.589,98.528 ; C29.1@224.409,98.349 v1(224.409,99.822)
  Bottom Layer w0.254: v1(224.409,99.822) 224.409,102.616 v1(224.536,102.743) ; 224.409,102.26 cw(c225.019,102.26) v1@224.588,102.691
NetC30_1: C30.1 C31.2 MIC.1 R22.1 | length 30.1
  Top Layer w0.254: MIC.1@236.38,83.976 cw(c235.512,83.109) 236.739,83.109 cw(c237.965,83.109) MIC.1@237.098,83.976 ; 236.739,80.498 ccw(c237.786,80.498) C31.2@237.046,79.758 236.739,80.064 MIC.1@236.739,84.335 ; 236.739,81.111 ccw(c238.399,81.111) C31.2@237.225,79.937
  Top Layer w0.5: R22.1@225.222,94.488 C30.1@227.406,94.488 227.406,94.472 228.223,93.655 234.244,93.655 v1(234.315,93.726)
  Bottom Layer w0.5: v1(234.315,93.726) 236.728,91.313 236.728,84.346 MIC.1@236.739,84.335 ; MIC.1@236.467,84.608 ccw(c235.835,85.239) 236.728,85.239 ; 236.728,85.291 ccw(c237.694,85.291) MIC.1@237.011,84.608
NetC30_2: C30.2 P2.1 | length 13.9
  Top Layer w0.5: C30.2@228.79,94.486 238.25,94.486 P2.1@238.76,94.996 cw(c237.53,96.226) 237.53,94.486 ; 236.323,94.486 ccw(c236.323,97.433) P2.1@238.406,95.35
NetC31_1: C31.1 C32.1 MIC.2 R23.2 | length 49
  Top Layer w0.254: R23.2@231.138,84.01 234.49,84.01 235.777,85.297 238.182,85.297 239.144,84.335 MIC.2@239.279,84.335 239.279,80.605 C31.1@238.43,79.756 ; R23.2@231.318,83.831 cw(c231.752,83.397) 231.752,84.01 cw(c231.752,84.624) R23.2@231.318,84.19 ; C32.1@233.858,108.204 v1(235.966,108.204) ; C32.1@234.037,108.024 cw(c234.471,107.591) 234.471,108.204 cw(c234.471,108.817) C32.1@234.037,108.384 ; 234.672,84.192 cw(c234.823,84.041) v1@234.823,84.255 ; v1@234.896,84.328 cw(c235.11,84.328) 234.959,84.479 ; 238.25,85.23 ccw(c239.189,86.169) MIC.2@239.254,84.843 ; C31.1@238.43,80.01 ccw(c238.43,80.623) 238.863,80.19 ccw(c239.297,79.756) C31.1@238.684,79.756 ; 238.507,84.973 cw(c237.869,84.335) MIC.2@238.771,84.335 ; 238.655,84.825 ccw(c239.227,85.397) MIC.2@239.266,84.589 ; MIC.2@238.92,83.976 cw(c238.052,83.109) 239.279,83.109 cw(c240.505,83.109) MIC.2@239.638,83.976
  Bottom Layer w0.254: v1(234.823,84.328) 234.823,86.36 233.738,87.445 233.738,103.563 235.966,105.791 v1(235.966,108.204)
NetC32_2: C32.2 U3.2 | length 7.5
  Top Layer w0.254: U3.2@226.727,106.896 227.876,106.896 v1(228.219,106.553) ; v1(231.267,108.204) 232.472,108.204 C32.2@232.474,108.206 ; 231.856,108.204 ccw(c231.856,108.823) C32.2@232.294,108.385 ; 231.864,108.204 cw(c231.864,107.596) C32.2@232.294,108.026
  Bottom Layer w0.254: v1(228.219,106.553) 228.854,106.553 230.505,108.204 v1(231.267,108.204)
NetC33_1: C33.1 LINE_IN.1 | length 20.7
  Top Layer w1: C33.1@252.781,84.582 257.556,84.582 LINE_IN.1@260.302,87.328 261.634,85.996 261.634,82.79 260.302,81.458 LINE_IN.1@260.302,81.328 ; LINE_IN.1@259.802,87.328 cw(c258.595,87.328) 259.448,86.474 cw(c260.302,85.621) 260.302,86.828 cw(c260.302,85.621) 261.156,86.474 cw(c262.009,87.328) LINE_IN.1@260.802,87.328 ; LINE_IN.1@260.802,81.328 cw(c262.322,81.328) 261.247,82.403
NetC33_2: C33.2 R26.1 | length 1.7
  Top Layer w0.6: R26.1@249.733,84.582 251.395,84.582 C33.2@251.397,84.584
NetC34_1: C34.1 LINE_IN.2 | length 33.5
  Top Layer w0.254: C34.1@252.781,83.058 255.016,83.058 257.229,80.845 258.908,80.845 259.752,80.001 261.992,80.001 263.319,81.328 LINE_IN.2@263.802,81.328 ; C34.1@252.96,82.878 cw(c253.394,82.445) 253.394,83.058 cw(c253.394,83.671) C34.1@252.96,83.238 ; 262.129,80.138 cw(c263.539,78.728) LINE_IN.2@263.74,80.712 ; 262.508,80.517 cw(c263.609,79.415) LINE_IN.2@263.765,80.965 ; 262.653,80.662 ccw(c261.987,81.328) LINE_IN.2@262.929,81.328 ; 262.886,80.895 cw(c263.678,80.103) LINE_IN.2@263.791,81.218
  Top Layer w1: LINE_IN.2@263.448,81.682 ccw(c262.595,82.535) 263.802,82.535 ccw(c265.009,82.535) LINE_IN.2@264.156,81.682 ; 263.779,84.582 LINE_IN.2@263.779,87.732 ; 263.779,86.065 cw(c265.065,86.065) 264.156,86.974 ccw(c265.009,86.121) 263.802,86.121 ccw(c262.595,86.121) 263.448,86.974 cw(c262.65,86.176) 263.779,86.176 ; LINE_IN.2@263.802,81.328 LINE_IN.2@263.802,87.328
NetC34_2: C34.2 R27.1 | length 1.7
  Top Layer w0.6: R27.1@249.733,83.058 251.395,83.058 C34.2@251.397,83.06
NetC35_2: C35.2 R27.2 U3.48 | length 49.1
  Top Layer w0.254: U3.48@225.377,104.373 cw(c225.215,104.211) 225.444,104.211 ; U3.48@225.377,105.046 225.444,104.979 225.444,102.978 v1(225.552,102.87) ; 225.444,103.307 ccw(c225.989,103.307) v1@225.604,102.922 ; C35.2@225.755,98.541 ccw(c225.321,98.975) 225.935,98.975 ccw(c226.548,98.975) C35.2@226.114,98.541 ; v1@225.933,99.695 225.935,99.693 C35.2@225.935,98.361 226.932,99.359 226.932,99.785 227.24,100.093 241.791,100.093 v1(242.57,99.314) ; C35.2@225.935,98.615 ccw(c225.935,99.229) 226.368,98.795 ccw(c226.802,98.361) C35.2@226.189,98.361 ; v1@246.761,82.931 v1(246.89,83.06) R27.2@248.349,83.06 ; R27.2@248.169,82.88 ccw(c247.735,82.446) 247.735,83.06 ccw(c247.735,83.673) R27.2@248.169,83.239
  Bottom Layer w0.254: v1(225.552,102.87) 225.933,102.489 v1(225.933,99.822) ; v1(242.57,99.314) 242.57,85.344 244.854,83.06 v1(246.89,83.06)
NetC36_2: C36.2 P2.2 R26.2 U3.1 | length 49.4
  Top Layer w0.254: U3.1@226.727,106.396 226.727,105.378 v1(227.076,105.029) ; C36.2@227.279,98.541 ccw(c226.845,98.975) 227.459,98.975 ccw(c228.072,98.975) 227.638,98.541 ccw(c228.072,98.975) 228.072,98.361 ccw(c228.072,97.748) C36.2@227.638,98.182 ; v1@227.457,99.568 v1(227.459,99.566) C36.2@227.459,98.361 237.934,98.361 P2.2@238.76,97.536 238.887,97.409 v1(246.507,97.409) ; P2.2@239.021,97.797 ccw(c239.957,98.733) 239.957,97.409 ccw(c239.957,96.339) P2.2@239.201,97.095 ; P2.2@239.201,97.977 ccw(c240.571,99.347) 240.571,97.409 ; v1(246.507,84.455) 246.636,84.584 R26.2@248.349,84.584 ; v1@246.559,84.403 cw(c246.994,83.968) 246.994,84.584 ; R26.2@248.169,84.404 ccw(c247.735,83.97) 247.735,84.584 ccw(c247.735,85.197) R26.2@248.169,84.763
  Bottom Layer w0.254: v1(227.076,105.029) 227.076,99.949 v1(227.459,99.566) ; v1(246.507,84.455) v1(246.507,97.409)
NetC37_2: C37.2 R28.2 R29.1 | length 9.4
  Top Layer w0.254: R28.2@246.636,81.216 C37.2@252.224,81.216 ; R28.2@246.815,81.037 cw(c247.249,80.603) 247.249,81.216 cw(c247.249,81.83) R28.2@246.815,81.396 ; 249.038,81.216 cw(c249.038,80.56) R29.1@249.502,81.024 ; 249.099,81.216 ccw(c249.099,81.786) R29.1@249.502,81.383 ; R29.1@249.862,81.024 cw(c250.326,80.56) 250.326,81.216 ; R29.1@249.862,81.383 ccw(c250.265,81.786) 250.265,81.216 ; C37.2@252.044,81.037 ccw(c251.61,80.603) 251.61,81.216 ccw(c251.61,81.83) C37.2@252.044,81.396
NetC38_2: C38.2 P3.1 R29.2 | length 27.4
  Top Layer w0.254: R29.2@249.68,79.819 249.744,79.756 v1(250.952,79.756) ; R29.2@249.86,79.64 cw(c250.14,79.36) 250.14,79.756 ; R29.2@249.86,79.999 ccw(c250.447,80.586) 250.447,79.756 ; v1(253.619,81.28) 254.7,81.28 C38.2@254.764,81.216 255.589,80.391 258.72,80.391 259.564,79.547 260.812,79.547 264.221,76.138 264.221,74.229 P3.1@263.144,73.152 ; 253.997,81.28 cw(c253.997,80.45) C38.2@254.584,81.037 ; 254.304,81.28 ccw(c254.304,81.676) C38.2@254.584,81.396 ; C38.2@254.764,80.962 cw(c254.764,80.349) 255.197,80.783 cw(c255.631,81.216) C38.2@255.018,81.216 ; P3.1@263.144,73.521 ccw(c263.144,74.412) 263.774,73.782 ccw(c264.404,73.152) P3.1@263.513,73.152 ; P3.1@263.144,73.775 ccw(c263.144,75.279) 264.208,74.216 ccw(c265.271,73.152) P3.1@263.767,73.152
  Bottom Layer w0.254: v1(250.952,79.756) 252.476,81.28 v1(253.619,81.28)
NetC44_2: C44.2 U6.8 Y3.1 | length 22.8
  Top Layer w0.254: U6.8@177.741,95.94 177.741,95.923 185.399,88.265 189.865,88.265 ; Y3.1@189.723,90.028 cw(c189.072,89.377) 189.992,89.377 cw(c190.912,89.377) Y3.1@190.261,90.028 ; Y3.1@189.992,90.424 189.992,88.392 189.865,88.265 ; C44.2@192.088,87.378 ccw(c191.474,87.378) 191.908,87.811 ccw(c192.341,88.245) C44.2@192.341,87.632 ; C44.2@192.341,87.378 191.454,88.265 189.865,88.265
NetC45_2: C45.2 U6.9 Y3.2 | length 22
  Top Layer w0.254: U6.9@178.094,96.294 184.004,90.384 184.004,90.302 184.536,89.77 187.916,89.77 Y3.2@188.57,90.424 ; 187.852,89.707 cw(c188.392,89.167) Y3.2@188.51,89.921 ; 188.009,89.863 ccw(c187.575,90.297) Y3.2@188.189,90.297 ; v1(191.135,89.408) 192.34,89.408 C45.2@192.341,89.41 ; 191.724,89.408 ccw(c191.724,90.027) C45.2@192.162,89.589 ; 191.732,89.408 cw(c191.732,88.8) C45.2@192.162,89.23
  Bottom Layer w0.254: Y3.2@188.57,89.916 cw(c188.57,88.413) 189.632,89.476 ; Y3.2@188.57,90.17 cw(c188.57,89.28) 189.199,89.909 ; Y3.2@188.57,90.424 188.684,90.424 189.7,89.408 v1(191.135,89.408) ; Y3.2@188.951,90.297 ccw(c189.287,90.297) 189.049,90.059
NetC47_2: C47.2 R31.1 U6.24 Y4.1 | length 26.1
  Top Layer w0.254: U6.24@183.398,101.597 185.516,99.479 185.633,99.479 186.287,98.825 187.687,98.825 Y4.1@191.008,95.504 193.04,97.536 193.04,100.762 ; Y4.1@190.5,95.504 ccw(c189.274,95.504) 190.141,96.371 ccw(c191.008,97.238) 191.008,96.012 ccw(c191.008,97.238) 191.875,96.371 ccw(c192.742,95.504) Y4.1@191.516,95.504 ; C47.2@192.026,100.774 192.038,100.762 193.04,100.762 ; C47.2@192.205,100.595 cw(c192.608,100.192) 192.608,100.762 ; C47.2@192.205,100.954 ccw(c192.669,101.418) 192.669,100.762 ; 193.259,100.838 cw(c193.259,99.965) 193.876,100.582 ccw(c193.443,100.149) 193.443,100.762 ccw(c193.443,101.375) 193.876,100.941 cw(c193.627,101.191) 193.627,100.838 ; 193.04,100.762 193.04,100.838 193.98,100.838 R31.1@194.056,100.762 193.04,100.762
NetC48_2: C48.2 R31.2 U6.23 Y4.2 | length 31.7
  Top Layer w0.254: U6.23@183.044,101.243 185.262,99.025 185.445,99.025 186.02,98.45 186.02,98.267 186.243,98.044 187.071,98.044 v1(187.325,98.298) ; R31.2@194.054,99.123 cw(c194.054,98.51) 194.488,98.944 cw(c194.922,99.377) R31.2@194.308,99.377 ; R31.2@194.234,99.198 cw(c194.668,98.764) 194.668,99.377 cw(c194.668,99.991) R31.2@194.234,99.557 ; Y4.2@195.529,95.863 ccw(c194.662,96.73) 195.888,96.73 ccw(c197.114,96.73) Y4.2@196.247,95.863 ; Y4.2@195.888,95.504 195.888,97.544 R31.2@194.054,99.377 C48.2@196.594,99.377 197.548,99.377 197.866,99.06 197.866,98.679 v1(197.739,98.552) ; C48.2@196.415,99.198 ccw(c195.981,98.764) 195.981,99.377 ccw(c195.981,99.991) C48.2@196.415,99.557 ; C48.2@196.774,99.198 cw(c197.208,98.764) 197.208,99.377 cw(c197.208,99.991) C48.2@196.774,99.557 ; v1@197.687,98.604 ccw(c197.256,99.035) 197.866,99.035
  Bottom Layer w0.254: v1(187.325,98.298) 197.485,98.298 v1(197.739,98.552)